# EAGLE board Olympus v2 (EAGLE 7.4.0), part 1 of 2
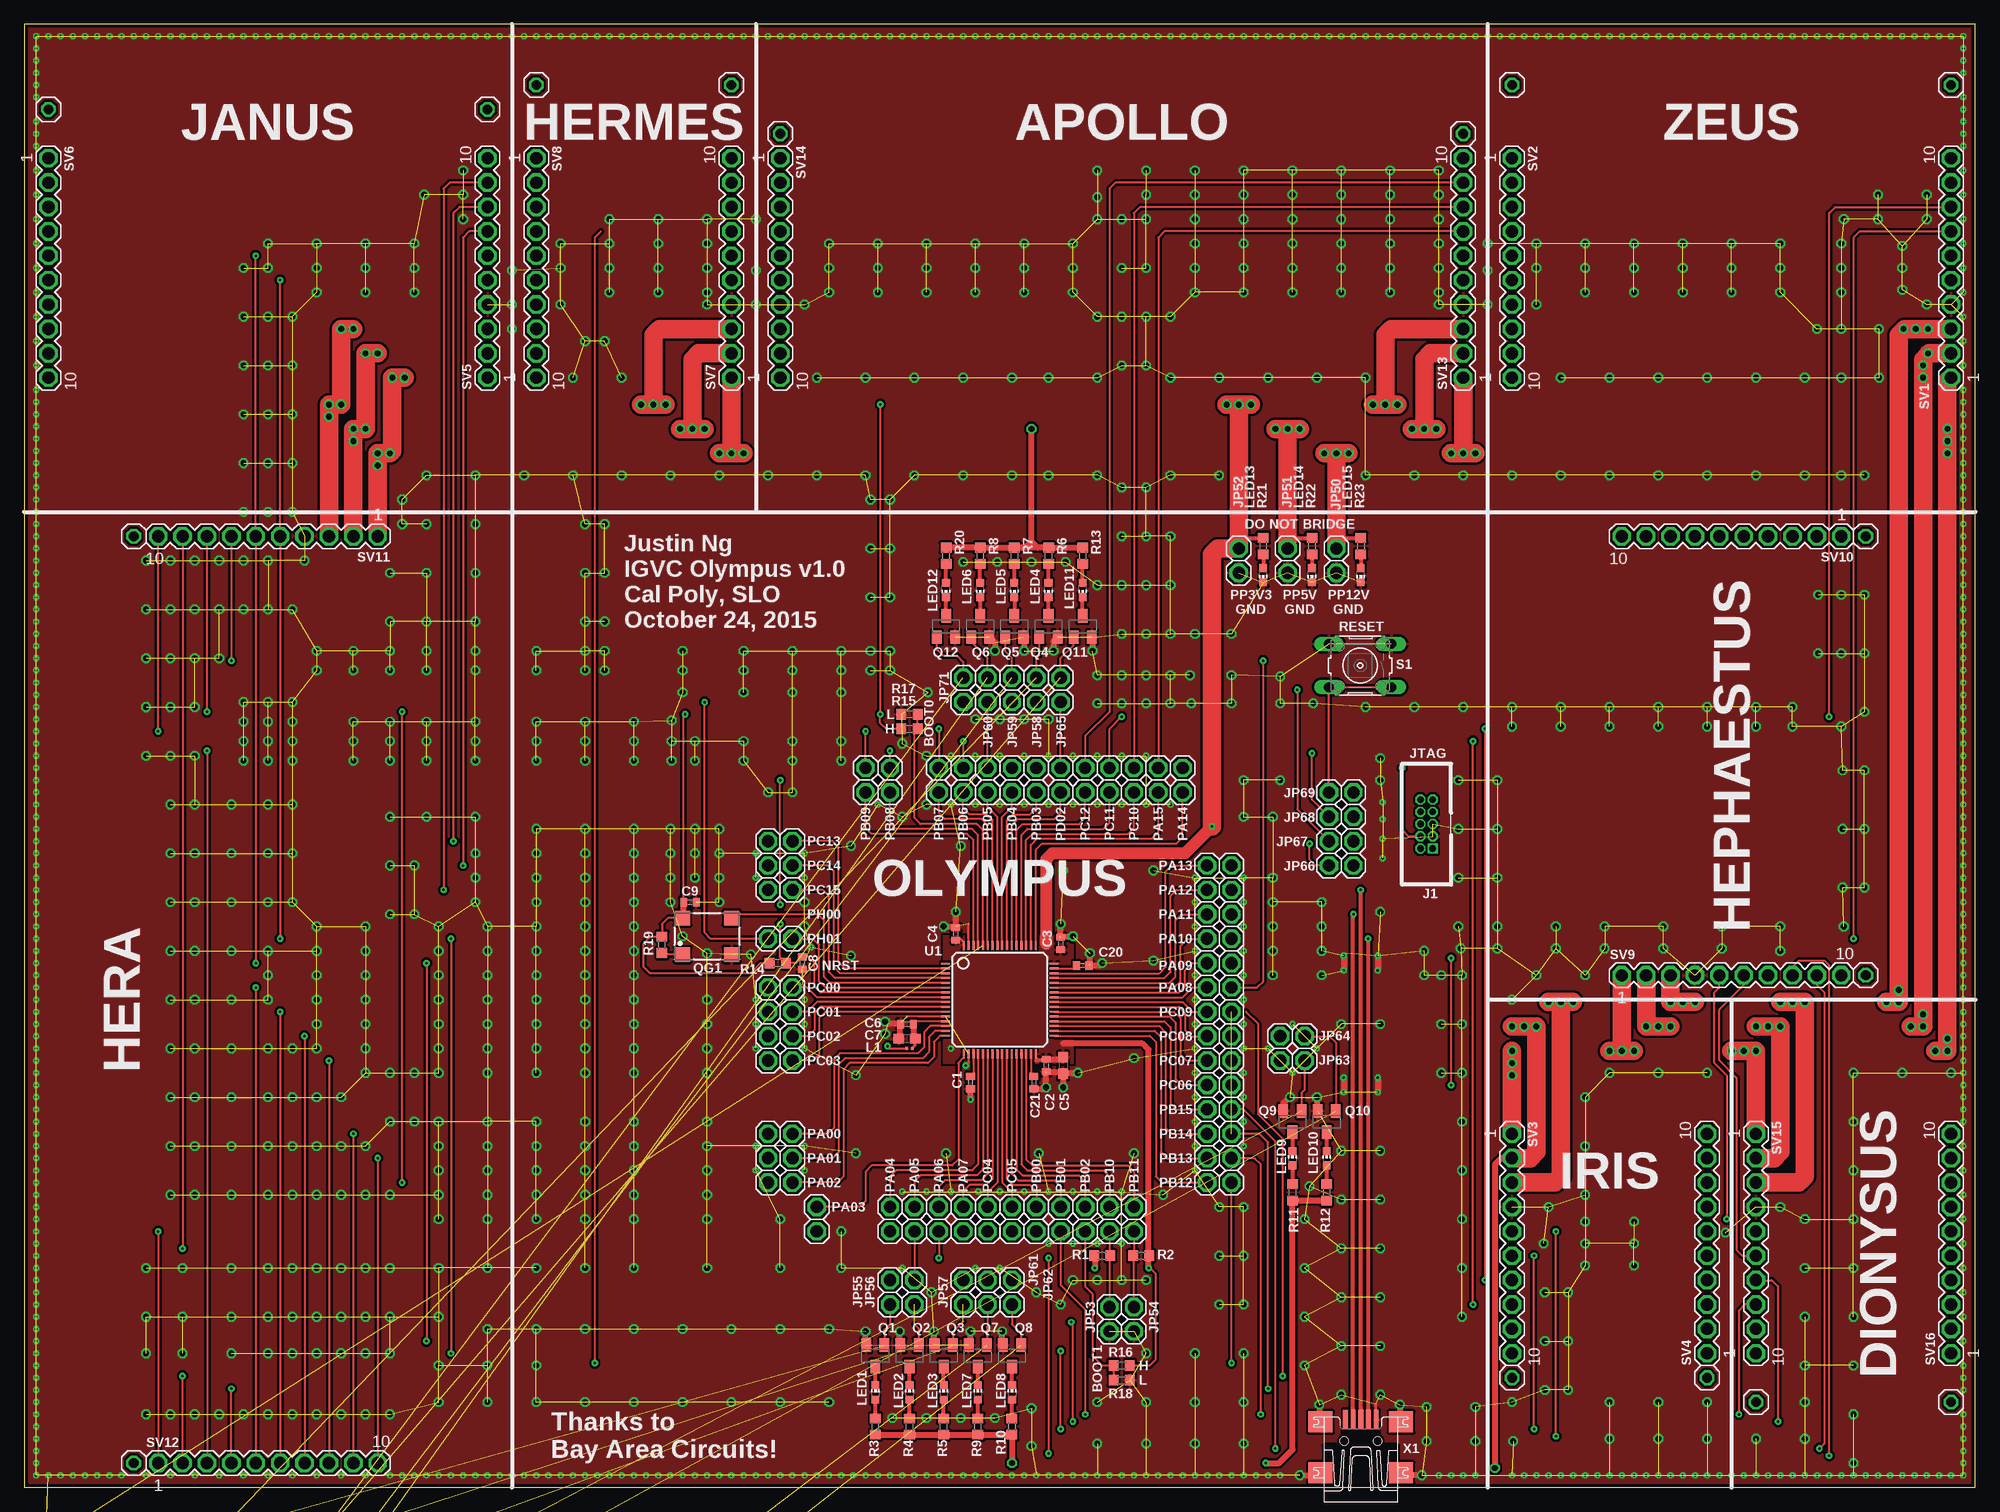
[diagram p0: board, top side]
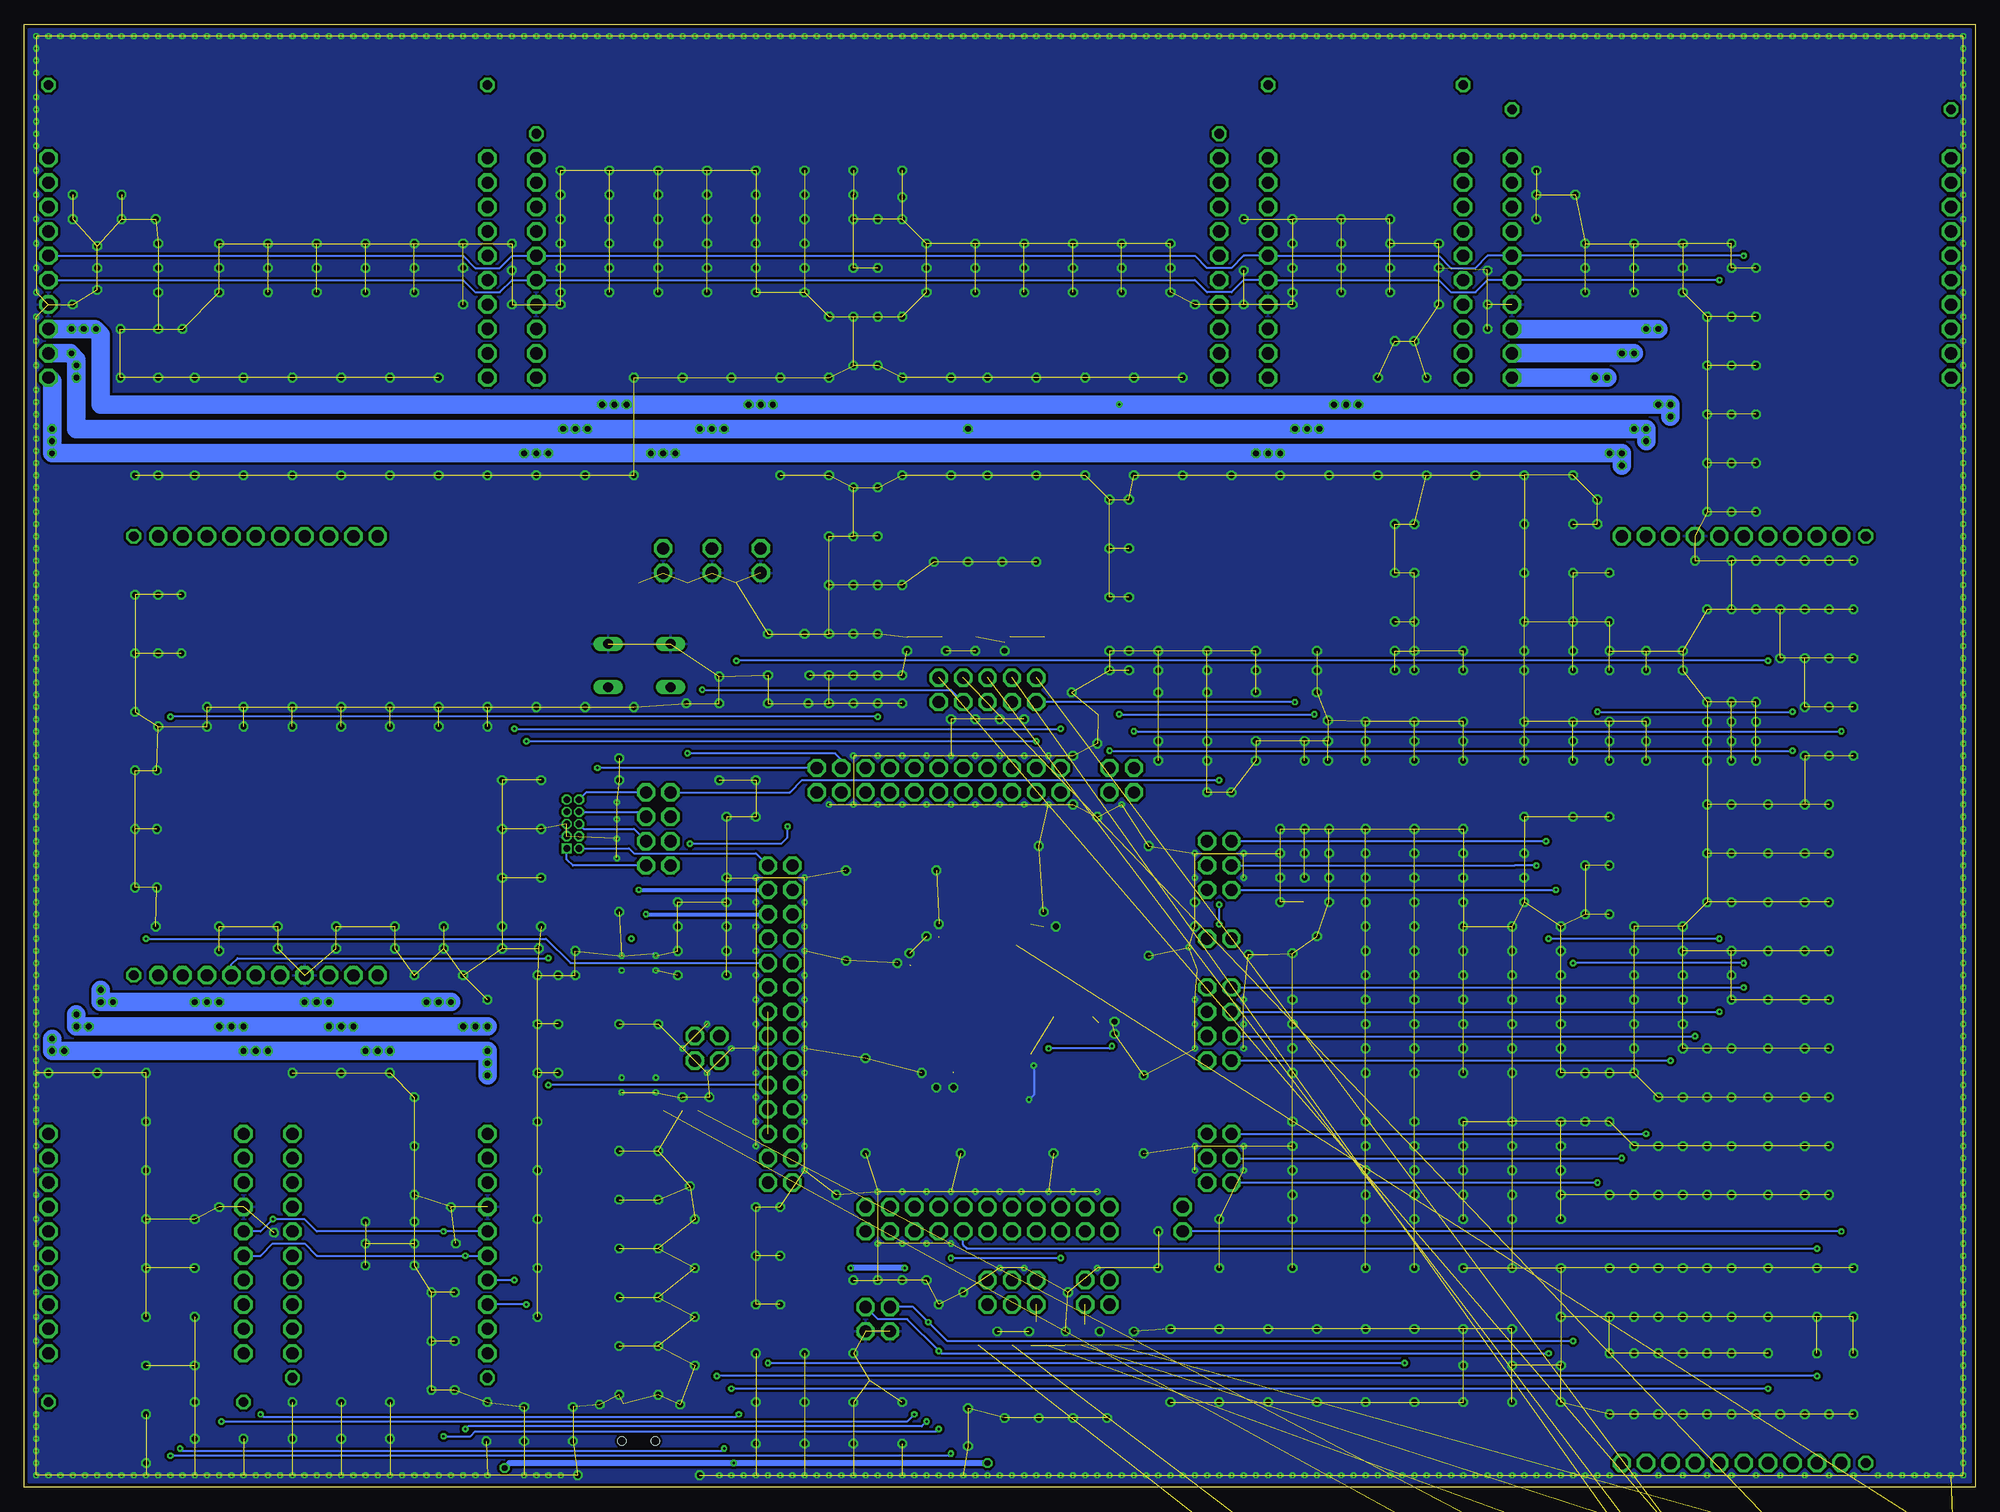
[diagram p1: board, bottom side, seen from below]

Size 203.2 x 152.4 mm. Coordinates in mm from the lower left corner, seen from the top.
Outline: 0,0 203.2,0 203.2,152.4 0,152.4 0,0
Copper layers (1*16): Top 0.035mm / dielectric 1.5mm / Bottom 0.035mm
Design rules "default *": minimum track width 7mil, minimum drill 10mil, track to track 8mil, track to pad 8mil, pad to pad 8mil, via to via 8mil, smd to smd 8mil, copper to edge 10mil, drill to drill 8mil, minimum pad ring 0mil, minimum via ring 8mil, stop-mask expansion 4mil, vias tented up to drill 0mil, thermal gap 10mil

## Footprints (pad centres in the part's own frame; a part is rotated, then mirrored left to right if it is on the bottom)
C0402 = smd 0.7 x 0.9: 1 -0.65,0; 2 0.65,0
C0603 = smd 1.1 x 1: 1 -0.85,0; 2 0.85,0
HEADER_10P_0.05 = drill 0.7 pad 1.016 square: 1 -2.54,-0.635 | drill 0.7 pad 1.016 octagon: 2 -2.54,0.635; 3 -1.27,-0.635; 4 -1.27,0.635; 5 0,-0.635; 6 0,0.635; 7 1.27,-0.635; 8 1.27,0.635; 9 2.54,-0.635; 10 2.54,0.635
1X02 = drill 1.27 octagon: 1 -1.27,0; 2 1.27,0
1X01 = drill 1.016 octagon: 1 0,0
L0201 = smd 0.25 x 0.35: 1 -0.275,0; 2 0.275,0
CHIP-LED0603 = smd 0.8 x 0.8: A 0,-0.75; C 0,0.75
SOT23 = smd 1 x 1.4: 1 -0.95,-1.1; 2 0.95,-1.1; 3 0,1.1
SM77H = smd 1.6 x 1.5: 1 -2.55,-1.9; 2 2.55,-1.9; 3 2.55,1.9; 4 -2.55,1.9
R0603 = smd 1 x 1.1: 1 -0.85,0; 2 0.85,0
B3F-10XX = drill 1.016 long: 1 -3.251,2.261; 2 3.251,2.261; 3 -3.251,-2.261; 4 3.251,-2.261
MA10-1 = drill 1.27 octagon: 1 -11.43,0; 2 -8.89,0; 3 -6.35,0; 4 -3.81,0; 5 -1.27,0; 6 1.27,0; 7 3.81,0; 8 6.35,0; 9 8.89,0; 10 11.43,0
LQFP-ST-64-2 = smd 0.9 x 0.2: 1 -5.65,3.75; 2 -5.65,3.25; 3 -5.65,2.75; 4 -5.65,2.25; 5 -5.65,1.75; 6 -5.65,1.25; 7 -5.65,0.75; 8 -5.65,0.25; 9 -5.65,-0.25; 10 -5.65,-0.75; 11 -5.65,-1.25; 12 -5.65,-1.75; 13 -5.65,-2.25; 14 -5.65,-2.75; 15 -5.65,-3.25; 16 -5.65,-3.75; 33 5.65,-3.75; 34 5.65,-3.25; 35 5.65,-2.75; 36 5.65,-2.25; 37 5.65,-1.75; 38 5.65,-1.25; 39 5.65,-0.75; 40 5.65,-0.25; 41 5.65,0.25; 42 5.65,0.75; 43 5.65,1.25; 44 5.65,1.75; 45 5.65,2.25; 46 5.65,2.75; 47 5.65,3.25; 48 5.65,3.75 | smd 0.2 x 0.9: 17 -3.75,-5.65; 18 -3.25,-5.65; 19 -2.75,-5.65; 20 -2.25,-5.65; 21 -1.75,-5.65; 22 -1.25,-5.65; 23 -0.75,-5.65; 24 -0.25,-5.65; 25 0.25,-5.65; 26 0.75,-5.65; 27 1.25,-5.65; 28 1.75,-5.65; 29 2.25,-5.65; 30 2.75,-5.65; 31 3.25,-5.65; 32 3.75,-5.65; 49 3.75,5.65; 50 3.25,5.65; 51 2.75,5.65; 52 2.25,5.65; 53 1.75,5.65; 54 1.25,5.65; 55 0.75,5.65; 56 0.25,5.65; 57 -0.25,5.65; 58 -0.75,5.65; 59 -1.25,5.65; 60 -1.75,5.65; 61 -2.25,5.65; 62 -2.75,5.65; 63 -3.25,5.65; 64 -3.75,5.65
UX60-MB-5ST = smd 2 x 0.5: 1 2.25,1.6; 2 2.25,0.8; 3 2.25,0; 4 2.25,-0.8; 5 2.25,-1.6 | smd 2.2 x 2.5: M1 -3.3,-4.2; M2 -3.3,4.2; M3 2,4.2; M4 2,-4.2 | hole 0.9: 0,-1.75; 0,1.75

## Placement (x,y rotation side)
C1  0.1uF  [C0402]  98.55,42.16 270 top
C2  0.1uF  [C0402]  106.43,43.94 270 top
C3  0.1uF  [C0402]  107.95,56.64 90 top
C4  0.1uF  [C0402]  97.03,57.66 90 top
C5  4.7uF  [C0603]  108.2,43.94 270 top
C6  0.1uF  [C0402]  91.95,48.26 180 top
C7  1uF  [C0603]  91.95,46.74 180 top
C8  0.1uF  [C0402]  81.03,54.61 270 top
C9  0.1uF  [C0402]  69.34,60.96 0 top
C20  2.2uF  [C0402]  110.24,54.36 0 top
C21  2.2uF  [C0402]  105.16,42.16 270 top
J1  HEADER_10P_0.05  [HEADER_10P_0.05]  146.05,69.09 90 top
JP1  [1X02]  78.74,36.83 0 top
JP2  [1X02]  78.74,34.29 0 top
JP3  [1X02]  78.74,31.75 0 top
JP4  [1X02]  82.55,27.94 90 top
JP5  [1X02]  90.17,27.94 90 top
JP6  [1X02]  92.71,27.94 90 top
JP7  [1X02]  95.25,27.94 90 top
JP8  [1X02]  97.79,27.94 90 top
JP9  [1X02]  124.46,52.07 180 top
JP10  [1X02]  124.46,54.61 180 top
JP11  [1X02]  124.46,57.15 180 top
JP12  [1X02]  124.46,59.69 180 top
JP13  [1X02]  124.46,62.23 180 top
JP14  [1X02]  124.46,64.77 180 top
JP15  [1X02]  120.65,73.66 270 top
JP16  [1X02]  118.11,73.66 270 top
JP17  [1X02]  105.41,27.94 90 top
JP18  [1X02]  107.95,27.94 90 top
JP19  [1X02]  110.49,27.94 90 top
JP20  [1X02]  105.41,73.66 270 top
JP21  [1X02]  102.87,73.66 270 top
JP22  [1X02]  100.33,73.66 270 top
JP23  [1X02]  97.79,73.66 270 top
JP24  [1X02]  95.25,73.66 270 top
JP25  [1X02]  90.17,73.66 270 top
JP26  [1X02]  87.63,73.66 270 top
JP27  [1X02]  113.03,27.94 90 top
JP28  [1X02]  115.57,27.94 90 top
JP29  [1X02]  124.46,31.75 180 top
JP30  [1X02]  124.46,34.29 180 top
JP31  [1X02]  124.46,36.83 180 top
JP32  [1X02]  124.46,39.37 180 top
JP33  [1X02]  78.74,52.07 180 top
JP34  [1X02]  78.74,49.53 180 top
JP35  [1X02]  78.74,46.99 180 top
JP36  [1X02]  78.74,44.45 180 top
JP37  [1X02]  100.33,27.94 270 top
JP38  [1X02]  102.87,27.94 270 top
JP39  [1X02]  124.46,41.91 0 top
JP40  [1X02]  124.46,44.45 0 top
JP41  [1X02]  124.46,46.99 0 top
JP42  [1X02]  124.46,49.53 0 top
JP43  [1X02]  115.57,73.66 90 top
JP44  [1X02]  113.03,73.66 90 top
JP45  [1X02]  110.49,73.66 90 top
JP46  [1X02]  78.74,67.31 180 top
JP47  [1X02]  78.74,64.77 180 top
JP48  [1X02]  78.74,62.23 180 top
JP49  [1X02]  107.95,73.66 90 top
JP50  [1X02]  136.65,96.52 270 top
JP51  [1X02]  131.57,96.52 270 top
JP52  [1X02]  126.49,96.52 270 top
JP53  [1X02]  113.03,17.53 270 top
JP54  [1X02]  115.57,17.53 270 top
JP55  [1X02]  90.17,20.32 90 top
JP56  [1X02]  92.71,20.32 90 top
JP57  [1X02]  97.79,20.32 90 top
JP58  [1X02]  105.41,83.06 270 top
JP59  [1X02]  102.87,83.06 270 top
JP60  [1X02]  100.33,83.06 270 top
JP61  [1X02]  100.33,20.32 90 top
JP62  [1X02]  102.87,20.32 90 top
JP63  [1X02]  132.08,44.45 180 top
JP64  [1X02]  132.08,46.99 180 top
JP65  [1X02]  107.95,83.06 270 top
JP66  [1X02]  137.16,64.77 0 top
JP67  [1X02]  137.16,67.31 180 top
JP68  [1X02]  137.16,69.85 180 top
JP69  [1X02]  137.16,72.39 180 top
JP70  [1X02]  78.74,57.15 180 top
JP71  [1X02]  97.79,83.06 270 top
JP72  [1X01]  11.43,2.54 0 top
JP73  [1X01]  11.43,99.06 0 top
JP74  [1X01]  2.54,143.51 0 top
JP75  [1X01]  48.26,143.51 0 top
JP76  [1X01]  53.34,146.05 0 top
JP77  [1X01]  73.66,146.05 0 top
JP78  [1X01]  78.74,140.97 0 top
JP79  [1X01]  149.86,140.97 0 top
JP80  [1X01]  154.94,146.05 0 top
JP81  [1X01]  200.66,146.05 0 top
JP82  [1X01]  191.77,53.34 0 top
JP83  [1X01]  191.77,99.06 0 top
JP84  [1X01]  154.94,11.43 0 top
JP85  [1X01]  175.26,11.43 0 top
JP86  [1X01]  180.34,8.89 0 top
JP87  [1X01]  200.66,8.89 0 top
JP88  [1X02]  2.54,-6.35 0 top  (outside the outline)
L1  [L0201]  92.2,45.72 180 top
LED1  [CHIP-LED0603]  88.65,9.91 0 top
LED2  [CHIP-LED0603]  92.2,9.91 0 top
LED3  [CHIP-LED0603]  95.76,9.91 0 top
LED4  [CHIP-LED0603]  106.68,93.47 180 top
LED5  [CHIP-LED0603]  103.12,93.47 180 top
LED6  [CHIP-LED0603]  99.57,93.47 180 top
LED7  [CHIP-LED0603]  99.31,9.91 0 top
LED8  [CHIP-LED0603]  102.87,9.91 0 top
LED9  [CHIP-LED0603]  132.08,34.29 0 top
LED10  [CHIP-LED0603]  135.64,34.29 0 top
LED11  [CHIP-LED0603]  110.24,93.47 180 top
LED12  [CHIP-LED0603]  96.01,93.47 180 top
LED13  [CHIP-LED0603]  129.03,95 180 top
LED14  [CHIP-LED0603]  134.11,95 180 top
LED15  [CHIP-LED0603]  139.19,95 180 top
Q1  BSS138  [SOT23]  88.65,13.72 180 top
Q2  BSS138  [SOT23]  92.2,13.72 180 top
Q3  BSS138  [SOT23]  95.76,13.72 180 top
Q4  BSS138  [SOT23]  106.68,89.66 0 top
Q5  BSS138  [SOT23]  103.12,89.66 0 top
Q6  BSS138  [SOT23]  99.57,89.66 0 top
Q7  BSS138  [SOT23]  99.31,13.72 180 top
Q8  BSS138  [SOT23]  102.87,13.72 180 top
Q9  BSS138  [SOT23]  132.08,38.1 180 top
Q10  BSS138  [SOT23]  135.64,38.1 180 top
Q11  BSS138  [SOT23]  110.24,89.66 0 top
Q12  BSS138  [SOT23]  96.01,89.66 0 top
QG1  KC7050A20.0000C3GE00  [SM77H]  71.12,57.4 0 top
R1  3.3k  [R0603]  112.27,24.13 180 top
R2  3.3k  [R0603]  116.33,24.13 0 top
R3  1k  [R0603]  88.65,6.35 270 top
R4  1k  [R0603]  92.2,6.35 270 top
R5  1k  [R0603]  95.76,6.35 270 top
R6  1k  [R0603]  106.68,97.03 90 top
R7  1k  [R0603]  103.12,97.03 90 top
R8  1k  [R0603]  99.57,97.03 90 top
R9  1k  [R0603]  99.31,6.35 270 top
R10  1k  [R0603]  102.87,6.35 270 top
R11  1k  [R0603]  132.08,30.73 270 top
R12  1k  [R0603]  135.64,30.73 270 top
R13  1k  [R0603]  110.24,97.03 90 top
R14  10k  [R0603]  78.49,54.61 180 top
R15  10k  [R0603]  92.2,78.99 180 top
R16  10k  [R0603]  114.3,12.7 0 top
R17  10k  [R0603]  92.2,80.52 0 top
R18  10k  [R0603]  114.3,11.18 180 top
R19  10k  [R0603]  66.42,56.52 90 top
R20  1k  [R0603]  96.01,97.03 90 top
R21  82  [R0603]  129.03,98.04 90 top
R22  200  [R0603]  134.11,98.04 90 top
R23  680  [R0603]  139.19,98.04 90 top
R24  10k  [R0603]  1.27,-10.16 0 top  (outside the outline)
R25  10k  [R0603]  1.27,-15.24 0 top  (outside the outline)
R26  10k  [R0603]  1.27,-20.32 0 top  (outside the outline)
R27  10k  [R0603]  1.27,-25.4 0 top  (outside the outline)
R28  10k  [R0603]  1.27,-30.48 0 top  (outside the outline)
R29  10k  [R0603]  1.27,-35.56 0 top  (outside the outline)
R30  10k  [R0603]  1.27,-40.64 0 top  (outside the outline)
R31  10k  [R0603]  1.27,-45.72 0 top  (outside the outline)
R32  10k  [R0603]  1.27,-50.8 0 top  (outside the outline)
R33  10k  [R0603]  1.27,-55.88 0 top  (outside the outline)
R34  10k  [R0603]  1.27,-60.96 0 top  (outside the outline)
R35  10k  [R0603]  1.27,-66.04 0 top  (outside the outline)
S1  [B3F-10XX]  139.13,85.6 180 top
SV1  [MA10-1]  200.66,127 90 top
SV2  [MA10-1]  154.94,127 270 top
SV3  [MA10-1]  154.94,25.4 270 top
SV4  [MA10-1]  175.26,25.4 90 top
SV5  [MA10-1]  48.26,127 90 top
SV6  [MA10-1]  2.54,127 270 top
SV7  [MA10-1]  73.66,127 90 top
SV8  [MA10-1]  53.34,127 270 top
SV9  [MA10-1]  177.8,53.34 0 top
SV10  [MA10-1]  177.8,99.06 180 top
SV11  [MA10-1]  25.4,99.06 180 top
SV12  [MA10-1]  25.4,2.54 0 top
SV13  [MA10-1]  149.86,127 90 top
SV14  [MA10-1]  78.74,127 270 top
SV15  [MA10-1]  180.34,25.4 270 top
SV16  [MA10-1]  200.66,25.4 90 top
U1  STM32F205RGT6  [LQFP-ST-64-2]  101.6,50.8 0 top
X1  MINI-USB-UX60-MB-5ST  [UX60-MB-5ST]  139.19,4.83 90 top

## Library data of the parts
C1-C9 C20 C21 R1 R2 R14 R17-R19 = rcl
J1 = Olympus; DIGI: 1175-1627-ND
JP1-JP71 JP88 = pinhead
JP72-JP87 = pinhead; DIGI: SAM1067-50-ND
L1 = rcl; DIGI: 445-15755-1-ND
LED1-LED12 = led; DIGI: 732-4966-1-ND
LED13-LED15 = led; DIGI: 160-1435-1-ND
Q1-Q12 = transistor-small-signal; DIGI: BSS138CT-ND
QG1 = crystal; DIGI: 1253-1317-1-ND; OC_FARNELL: unknown; OC_NEWARK: unknown
R3-R13 R20-R35 = resistor
R15 R16 = rcl; BOMOPTION: NOSTUFF
S1 = switch-omron; DIGI: 679-2428-ND; MPN: B3F-1000; OC_FARNELL: 176432; OC_NEWARK: 36M3542
SV1-SV16 = con-lstb; OC_FARNELL: unknown; OC_NEWARK: unknown
U1 = Olympus; DIGI: 497-11157-ND
X1 = con-hirose; DIGI: H2959CT-ND; OC_FARNELL: unknown; OC_NEWARK: unknown

## Nets
APOLLO_SPI_MOSI: JP45.2 SV13.9
APOLLO_SPI_SCK: JP43.2 SV13.8
APOLLO_SPI_SS_N: JP16.1 JP68.2 SV13.7
DIONYSUS_BRD_EN: JP18.1 SV15.7
DIONYSUS_GPIO: JP30.1 SV15.8
ENABLE: SV7.7
GND: C1.2 C2.2 C3.2 C4.2 C5.2 C6.2 C7.2 C8.2 C9.2 C20.2 C21.2 J1.3 J1.5 JP50.2 JP51.2 JP52.2 JP53.2 JP54.2 LED13.C LED14.C LED15.C Q1.2 Q2.2 Q3.2 Q4.2 Q5.2 Q6.2 Q7.2 Q8.2 Q9.2 Q10.2 Q11.2 Q12.2 QG1.2 R17.1 R18.1 R24.2 R25.2 R26.2 R27.2 R28.2 R29.2 R30.2 R31.2 R32.2 R33.2 R34.2 R35.2 S1.3 S1.4 SV1.4 SV3.4 SV5.4 SV7.4 SV9.4 SV11.4 SV13.4 SV15.4 U1.12 U1.18 U1.63 X1.5
HEPHAESTUS_BRAKE_DIR: JP21.1
HEPHAESTUS_BRAKE_DIR2: JP40.2
HEPHAESTUS_BRAKE_FAULT: JP38.2
HEPHAESTUS_DIR: JP39.2 SV9.7
HEPHAESTUS_DIR2: JP41.2
HEPHAESTUS_GPIO: JP32.1 SV9.9
HEPHAESTUS_PWM_BRAKE: JP8.1
HEPHAESTUS_SPD: JP7.1 SV9.8
HEPHAESTUS_STEER_FAULT: JP37.2
HERA_HALL1: JP25.1 SV12.3
HERA_HALL2: JP31.1 JP42.2 SV12.4
HERA_SONAR1: JP9.1 SV11.7
HERA_SONAR2: JP3.1 SV11.8
HERA_SONAR3: JP17.1 SV11.9
HERA_SONAR4: JP26.1 SV11.10
HERA_SONAR5: JP4.1 SV12.1
HERA_SONAR6: SV12.2
HERA_STEER: JP33.2 SV12.5
HERA_TEMP1: JP34.2 SV12.6
HERA_TEMP2: JP35.2 SV12.7
HERA_TEMP3: JP36.2 SV12.8
HERA_TEMP4: JP1.1 SV12.9
HERA_TEMP5: JP2.1 SV12.10
HERMES_AUTOMAN: JP29.1
HERMES_PED_DETECT: JP5.1
I2C_SCL: JP27.1 JP53.1 R1.1 SV1.6 SV3.6 SV5.6 SV7.6 SV9.6 SV11.6 SV13.6 SV15.6
I2C_SDA: JP28.1 JP54.1 R2.1 SV1.5 SV3.5 SV5.5 SV7.5 SV9.5 SV11.5 SV13.5 SV15.5
IRIS_UART_RX: JP24.1 SV3.7
IRIS_UART_TX: JP23.1 SV3.8
JANUS_AUTOMAN: JP48.2 SV5.9
JANUS_F: JP47.2 SV5.7
JANUS_R: JP46.2 SV5.8
JTAG_NRST: J1.10 JP69.1
JTAG_SWO: J1.6 JP67.1
JTAG_TDI: J1.8 JP68.1
JTAG_VREF: J1.1 JP66.2
LED1_A: LED1.A R3.1
LED1_C: LED1.C Q1.3
LED1_G: JP55.1 Q1.1 R24.1
LED2_A: LED2.A R4.1
LED2_C: LED2.C Q2.3
LED2_G: JP56.1 Q2.1 R25.1
LED3_A: LED3.A R5.1
LED3_C: LED3.C Q3.3
LED3_G: JP57.1 Q3.1 R26.1
LED4_A: LED4.A R6.1
LED4_C: LED4.C Q4.3
LED4_G: JP58.1 Q4.1 R27.1
LED5_A: LED5.A R7.1
LED5_C: LED5.C Q5.3
LED5_G: JP59.1 Q5.1 R32.1
LED6_A: LED6.A R8.1
LED6_C: LED6.C Q6.3
LED6_G: JP60.1 Q6.1 R33.1
LED7_A: LED7.A R9.1
LED7_C: LED7.C Q7.3
LED7_G: JP61.1 Q7.1 R34.1
LED8_A: LED8.A R10.1
LED8_C: LED8.C Q8.3
LED8_G: JP62.1 Q8.1 R35.1
LED9_A: LED9.A R11.1
LED9_C: LED9.C Q9.3
LED9_G: JP63.1 Q9.1 R28.1
LED10_A: LED10.A R12.1
LED10_C: LED10.C Q10.3
LED10_G: JP64.1 Q10.1 R29.1
LED11_A: LED11.A R13.1
LED11_C: LED11.C Q11.3
LED11_G: JP65.1 Q11.1 R30.1
LED12_A: LED12.A R20.1
LED12_C: LED12.C Q12.3
LED12_G: JP71.1 Q12.1 R31.1
LED13_R: LED13.A R21.1
LED14_R: LED14.A R22.1
LED15_R: LED15.A R23.1
MCU_BOOT0: JP88.1 R15.1 R17.2 U1.60
MCU_BOOT1: JP19.1 R16.1 R18.2
MCU_NRST: C8.1 JP69.2 R14.1 S1.1 S1.2 U1.7
MCU_PA0: JP1.2 U1.14
MCU_PA1: JP2.2 U1.15
MCU_PA2: JP3.2 U1.16
MCU_PA3: JP4.2 U1.17
MCU_PA4: JP5.2 U1.20
MCU_PA5: JP6.2 U1.21
MCU_PA6: JP7.2 U1.22
MCU_PA7: JP8.2 U1.23
MCU_PA8: JP9.2 U1.41
MCU_PA9: JP10.2 U1.42
MCU_PA10: JP11.2 U1.43
MCU_PA11: JP12.2 U1.44
MCU_PA12: JP13.2 U1.45
MCU_PA13: JP14.2 U1.46
MCU_PA14: JP15.2 U1.49
MCU_PA15: JP16.2 U1.50
MCU_PB0: JP17.2 U1.26
MCU_PB1: JP18.2 U1.27
MCU_PB2: JP19.2 U1.28
MCU_PB3: JP20.2 U1.55
MCU_PB4: JP21.2 U1.56
MCU_PB5: JP22.2 U1.57
MCU_PB6: JP23.2 U1.58
MCU_PB7: JP24.2 U1.59
MCU_PB8: JP25.2 U1.61
MCU_PB9: JP26.2 U1.62
MCU_PB10: JP27.2 U1.29
MCU_PB11: JP28.2 U1.30
MCU_PB12: JP29.2 U1.33
MCU_PB13: JP30.2 U1.34
MCU_PB14: JP31.2 U1.35
MCU_PB15: JP32.2 U1.36
MCU_PC0: JP33.1 U1.8
MCU_PC1: JP34.1 U1.9
MCU_PC2: JP35.1 U1.10
MCU_PC3: JP36.1 U1.11
MCU_PC4: JP37.1 U1.24
MCU_PC5: JP38.1 U1.25
MCU_PC6: JP39.1 U1.37
MCU_PC7: JP40.1 U1.38
MCU_PC8: JP41.1 U1.39
MCU_PC9: JP42.1 U1.40
MCU_PC10: JP43.1 U1.51
MCU_PC11: JP44.1 U1.52
MCU_PC12: JP45.1 U1.53
MCU_PC13: JP46.1 U1.2
MCU_PC14: JP47.1 U1.3
MCU_PC15: JP48.1 U1.4
MCU_PD2: JP49.1 U1.54
MCU_PH0: QG1.3 U1.5
MCU_PH1: JP70.1 U1.6
MCU_VCAP_1: C21.1 U1.31
MCU_VCAP_2: C20.1 U1.47
N$2: JP88.2
OLYMPUS_DEBUG_LED: JP11.1
OLYMPUS_GPIO1: JP55.2
OLYMPUS_GPIO2: JP6.1 JP56.2
OLYMPUS_GPIO3: JP57.2
OLYMPUS_GPIO4: JP58.2 JP67.2
OLYMPUS_GPIO5: JP59.2
OLYMPUS_GPIO6: JP22.1 JP60.2
OLYMPUS_GPIO7: JP61.2
OLYMPUS_GPIO8: JP62.2
OLYMPUS_GPIO9: JP63.2
OLYMPUS_GPIO10: JP64.2
OLYMPUS_GPIO11: JP49.2 JP65.2
OLYMPUS_GPIO12: JP70.2 JP71.2
OLYMPUS_JTAG_SWO: JP20.1
OLYMPUS_SWDCLK: J1.4 JP15.1
OLYMPUS_SWDIO: J1.2 JP14.1
OLYMPUS_USBDN: JP12.1 X1.2
OLYMPUS_USBDP: JP13.1 X1.3
OLYMPUS_USBID: X1.4
OSC_EN: QG1.1 R19.1
PP3V3: C1.1 C2.1 C3.1 C4.1 C5.1 C9.1 JP52.1 JP66.1 L1.2 QG1.4 R1.2 R2.2 R14.2 R15.2 R16.2 R19.2 R21.2 SV1.3 SV3.3 SV5.3 SV7.3 SV9.3 SV11.3 SV13.3 SV15.3 U1.19 U1.32 U1.48 U1.64
PP3V3A: C6.1 C7.1 L1.1 U1.13
PP5V: JP51.1 R3.2 R4.2 R5.2 R6.2 R7.2 R8.2 R9.2 R10.2 R11.2 R12.2 R13.2 R20.2 R22.2 SV1.2 SV3.2 SV5.2 SV7.2 SV9.2 SV11.2 SV13.2 SV15.2
PP12V: JP50.1 R23.2 SV1.1 SV3.1 SV5.1 SV7.1 SV9.1 SV11.1 SV13.1 SV15.1
TH_ADC: SV7.8
ZEUS_GPIO: JP44.2 SV1.8
ZEUS_SHUTDOWN_N: JP10.1 SV1.7